# Altium PCB PIC18F57Q84_Curiosity_Nano.PcbDoc (part 3 of 3)
Units mm, origin at the board's own origin, x right, y up, seen from the top; angles counter-clockwise.
Board outline 83.82 x 20.32 mm, 4 copper layers (Top Layer, Gnd Plane, Pwr Plane, Bottom Layer), stack 1.574 mm thick; 85 components, 108 nets, 442 pads, 224 vias.
Unrouted connection lines stored in the file: 1.
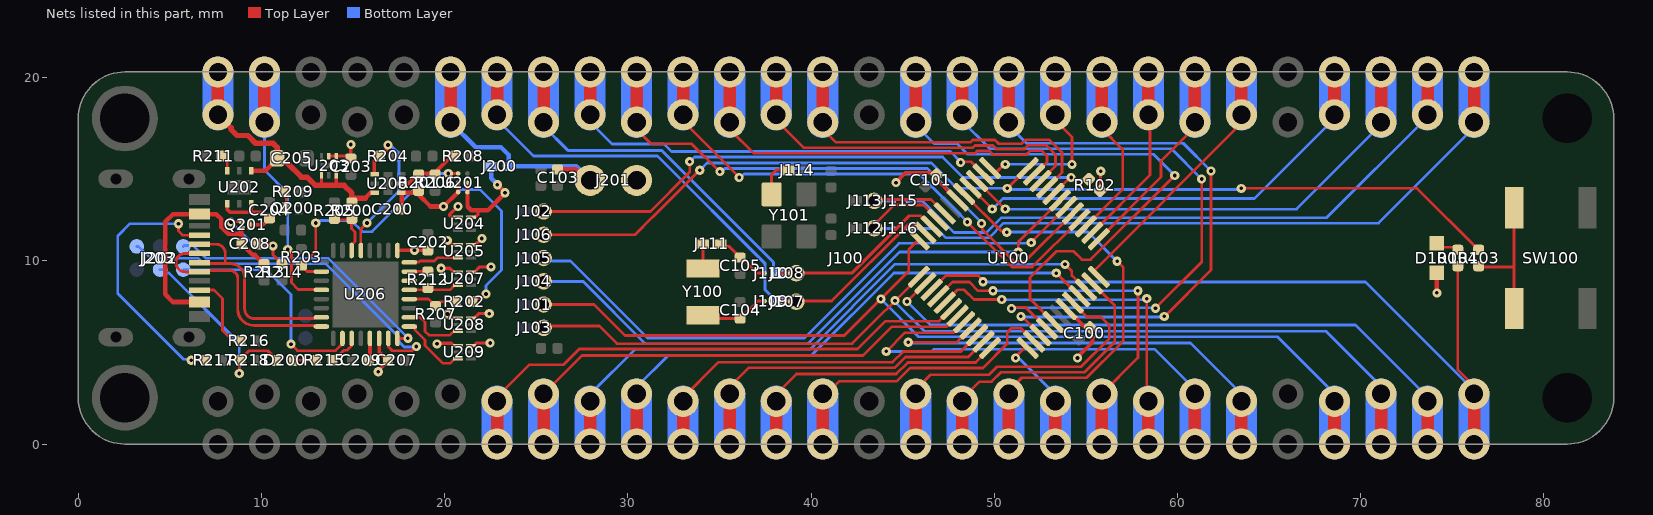
[diagram p4: the nets of this part, all layers, seen from the top]

## Via types
v1: diameter 0.5, hole 0.2, Top Layer to Bottom Layer, 214 vias
v2: diameter 0.5, hole 0.2, Top Layer to Bottom Layer, tented both sides, 8 vias
v3: diameter 0.5, hole 0.2, Top Layer to Bottom Layer, tented top, 2 vias

## Nets (pads, with @x,y where several pads share a name; then routed paths per layer and width w, separated by ;. In a path a pad name is that pad's centre, name@x,y a point inside that pad or via, vN(x,y) a via of type N, cw(c..) or ccw(c..) an arc to the next point about the centre after c; other vN are vias at no path point) (continued)
NetC208_1: C208.1 Q201.1 R214.1 | length 5.5
  Top Layer w0.15: v2(8.338,12.122) 8.366,12.15 Q201.1@8.927,12.15 ; C208.1@9.818,10.931 10.431,10.931 10.536,10.825 v2(10.631,10.825) 10.631,10.339 R214.1@11.145,9.825
  Bottom Layer w0.15: v2(8.338,12.122) 9.635,10.825 v2(10.631,10.825)
NetD100_2: D100.2 R104.2 | length 1.3
  Top Layer w0.15: D100.2@74.168,10.96 74.38,10.748 75.173,10.748 R104.2@75.311,10.61
NetD200_2: D200.2 R215.1 | length 1.3
  Top Layer w0.15: D200.2@11.715,4.575 R215.1@12.98,4.575
NetJ111_2: J111.2 Y100.2 | length 1.3
  Top Layer w0.159: Y100.2@34.103,9.591 J111.2@34.103,10.926
NetJ114_2: J114.2 Y101.1 | length 2.1
  Top Layer w0.159: Y101.1@37.85,13.635 37.85,14.712 38.098,14.96 J114.2@38.775,14.96
NetJ203_A5: J203.A5 R217.1 | length 14.7
  Top Layer w0.15: v2(5.468,12.035) 5.468,11.634 5.691,11.41 J203.A5@6.665,11.41 ; v2(6.165,4.575) R217.1@6.944,4.575
  Bottom Layer w0.15: v2(5.468,12.035) 2.827,12.035 2.15,11.358 2.15,8.219 5.737,4.632 6.108,4.632 v2(6.165,4.575)
NetJ203_B5: J203.B5 R216.1 | length 4.4
  Top Layer w0.15: J203.B5@6.665,8.41 7.411,8.41 7.865,7.956 7.865,6.208 8.44,5.633 R216.1@8.852,5.633
NetQ200_3: Q200.3 R209.1 | length 1
  Top Layer w0.15: R209.1@11.214,13.7 11.355,13.559 Q200.3@11.355,12.8
NetR103_2: R103.2 SW100.3 SW100.4 | length 7.4
  Top Layer w0.15: R103.2@76.454,9.71 76.489,9.675 78.375,9.675 ; SW100.4@78.391,7.41 78.375,7.426 78.375,9.675 ; SW100.3@78.391,12.91 78.375,12.894 78.375,9.675
NetR211_1: R211.1 U202.3 | length 0.9
  Top Layer w0.15: R211.1@7.813,15.725 7.813,15.666 8.135,15.344 U202.3@8.135,14.912
RA0_ANA0: J100.43 U100.21 | length 16.8
  Top Layer w0.15: J100.43@40.64,17.254 J100.43@40.64,17.577 40.64,17.21 41.375,16.475 48.701,16.475 48.826,16.6 50.049,16.6 50.249,16.4 51.5,16.4 51.711,16.611 53.013,16.611 53.672,15.951 53.699,15.951 53.699,14.827 U100.21@52.886,14.014
RA1_ANA1: J100.44 U100.22 | length 18.4
  Top Layer w0.15: J100.44@38.188,18.072 38.188,17.591 39.587,16.193 39.605,16.175 48.826,16.175 48.951,16.3 49.925,16.3 50.125,16.1 51.624,16.1 51.835,16.311 52.854,16.311 53.354,15.811 53.354,15.774 53.354,15.188 U100.22@52.532,14.367
RA2_ANA2: J100.45 U100.23 | length 19.9
  Top Layer w0.15: J100.45@35.56,17.577 35.56,17.192 36.877,15.875 48.95,15.875 49.075,16 49.738,16 49.938,15.8 51.749,15.8 51.959,16.011 52.614,16.011 52.886,15.739 52.886,15.411 U100.23@52.196,14.721
RA3_SW0: J106.2 R103.1 U100.24 | length 56.3
  Top Layer w0.15: J106.2@25.4,11.43 30.38,11.43 31.35,12.4 31.359,12.4 33.909,14.95 v1(33.925,14.95) ; v1(50.714,13.963) U100.24@51.825,15.074 ; v1(63.489,13.963) 73.092,13.963 R103.1@76.445,10.61
  Bottom Layer w0.15: v1(33.925,14.95) 34.325,15.35 46.572,15.35 47.959,13.963 v1(50.714,13.963) 50.781,13.896 63.328,13.896 63.395,13.963 v1(63.489,13.963)
RA4: J100.38 U100.25 | length 7.8
  Top Layer w0.15: U100.25@49.912,14.937 50.004,14.845 50.11,14.845 50.541,15.275 v1(50.6,15.275) ; J100.38@53.252,18.072 53.252,17.758 54.25,16.76 v1(54.25,15.275)
  Bottom Layer w0.15: v1(50.6,15.275) v1(54.25,15.275)
RA5_ANA5: J100.48 U100.26 | length 23.2
  Top Layer w0.15: v1(48.166,15.375) 48.207,15.415 48.727,15.415 U100.26@49.421,14.721
  Bottom Layer w0.15: J100.48@27.852,18.072 28.237,17.686 28.237,17.288 29.144,16.381 31.979,16.381 32.385,15.975 47.607,15.975 48.166,15.415 v1(48.166,15.375)
RA6: J100.29 J116.1 | length 33.9
  Bottom Layer w0.15: 46.85,11.775 47.365,11.26 49.709,11.26 50.514,12.065 70.983,12.065 76.2,17.282 J100.29@76.2,17.577
  Bottom Layer w0.159: J116.1@45.275,11.775 46.85,11.775
RA6_OSC2: J112.2 J116.2 U100.33 | length 5.5
  Top Layer w0.15: J112.2@43.362,11.874 44.538,13.05 46.142,13.05 U100.33@46.946,12.246
  Bottom Layer w0.159: J112.2@43.45,11.785 43.46,11.775 J116.2@44.525,11.775
RA7: J100.30 J115.1 | length 31.9
  Bottom Layer w0.15: 46.091,13.275 47.806,11.56 49.585,11.56 50.39,12.365 68.157,12.365 73.572,17.779 J100.30@73.572,18.072
  Bottom Layer w0.159: J115.1@45.275,13.275 46.091,13.275
RA7_OSC1: J113.2 J115.2 U100.32 | length 5.4
  Top Layer w0.15: J113.2@43.45,13.285 43.515,13.35 46.549,13.35 U100.32@47.388,12.511
  Bottom Layer w0.15: J113.2@43.45,13.285 43.46,13.275 J115.2@44.525,13.275
RB0_UART2/4_TX: J100.16 U100.8 | length 15.2
  Top Layer w0.15: J100.16@45.72,2.743 45.72,2.988 46.519,3.787 49.721,3.787 50.16,4.225 54.75,4.225 56.288,5.763 56.288,6.478 55.82,6.946 55.074,6.946 U100.8@54.3,7.72
RB1_I2C1_SCL: J100.10 U100.9 | length 27.6
  Top Layer w0.15: v1@53.39,9.338 U100.9@54.654,8.074
  Bottom Layer w0.15: J100.10@30.48,2.743 30.48,3.12 32.21,4.85 40.035,4.85 44.522,9.337 v1(53.388,9.337)
RB2_I2C1_SDA: J100.9 U100.10 | length 31.2
  Top Layer w0.15: v1(53.863,9.812) 54.238,9.437 54.238,9.196 U100.10@55.007,8.428
  Bottom Layer w0.15: J100.9@28.028,2.248 28.028,2.808 30.396,5.175 39.936,5.175 44.586,9.825 53.85,9.825 v1(53.863,9.812)
RB3_UART2/4_RX: J100.17 U100.11 | length 13.5
  Top Layer w0.15: J100.17@48.348,2.248 48.348,2.563 49.197,3.412 49.863,3.412 50.377,3.925 54.925,3.925 56.588,5.588 56.588,6.603 56.588,7.554 U100.11@55.361,8.781
  Bottom Layer w0.15: J100.17@48.348,2.248 J100.17@48.348,2.263
RB4_ANB4_PWM2/3: J100.46 U100.16 | length 26.5
  Top Layer w0.15: J100.46@33.02,17.983 33.279,17.724 33.279,17.371 36.075,14.575 v1(36.075,14.554) ; v1(48.537,12.122) 48.537,12.105 50.977,9.665 52.073,9.665 U100.16@54.654,12.246
  Bottom Layer w0.15: v1(36.075,14.554) 36.142,14.554 36.338,14.75 45.909,14.75 v1(48.537,12.122)
RB5_ANB5_PWM2/3: J100.47 U100.17 | length 28.6
  Top Layer w0.15: J100.47@30.48,17.577 30.48,17.195 31.275,16.4 33.482,16.4 35.007,14.875 v1(35.025,14.875) ; v1(49.307,12.041) 49.352,11.997 49.352,11.715 51.084,9.983 51.683,9.983 U100.17@54.3,12.6
  Bottom Layer w0.15: v1(35.025,14.875) 35.113,14.875 35.288,15.05 46.349,15.05 49.307,12.091 v1(49.307,12.041)
RB6_ICSPCLK: J105.2 U100.18 | length 33.4
  Top Layer w0.15: v1(52.028,10.999) 52.028,11.034 U100.18@53.947,12.953
  Bottom Layer w0.15: J105.2@25.4,10.16 25.544,10.016 25.846,10.016 25.863,10 26.87,10 31.095,5.775 39.625,5.775 44.81,10.96 51.989,10.96 v1(52.028,10.999)
RB7_ICSPDAT: J104.2 U100.19 | length 33.2
  Top Layer w0.15: v1(51.313,10.48) 51.313,11.027 U100.19@53.593,13.307
  Bottom Layer w0.15: J104.2@25.4,8.89 25.409,8.881 27.565,8.881 30.971,5.475 39.812,5.475 44.825,10.488 51.305,10.488 v1(51.313,10.48)
RC0: J100.49 J108.1 | length 16.6
  Bottom Layer w0.159: J100.49@25.4,17.577 25.4,17.362 26.722,16.04 31.84,16.04 37.954,9.925 37.954,9.502 38.125,9.332 J108.1@38.2,9.332
RC0_ANC0: J108.2 J110.1 U100.34 | length 9.9
  Top Layer w0.159: J110.1@38.213,9.332 39.231,9.332 42.223,9.332 45.36,12.469 45.974,12.469 46.539,11.904 U100.34@46.593,11.904
RC1: J100.50 J107.1 | length 20.6
  Bottom Layer w0.159: J100.50@22.86,17.983 22.86,17.722 24.851,15.731 31.619,15.731 37.498,9.852 37.498,8.417 37.954,7.961 37.954,7.946 38.125,7.775 J107.1@38.2,7.775
RC1_ANC1: J107.2 J109.1 U100.35 | length 10
  Top Layer w0.15: J107.2@39.231,7.808 41.129,7.808 45.337,12.016 45.656,12.016 46.133,11.539 U100.35@46.239,11.539
  Top Layer w0.159: J109.1@38.213,7.807 39.23,7.807 J107.2@39.231,7.808
RC2: J100.20 U100.40 | length 18
  Top Layer w0.15: U100.40@46.946,8.074 47.718,8.846 48.649,8.846 49.124,8.371 v1(49.937,8.371) ; J100.20@55.792,2.655 57.857,4.72 57.857,8.365 v1(57.847,8.375)
  Bottom Layer w0.15: v1(49.937,8.371) 57.843,8.371 v1(57.847,8.375)
RC3: J100.21 U100.41 | length 17.3
  Top Layer w0.15: U100.41@47.3,7.72 48.007,8.428 48.36,8.428 48.892,7.896 v1(50.412,7.896) ; J100.21@58.332,2.248 58.332,7.942 v1(58.333,7.944)
  Bottom Layer w0.15: v1(50.412,7.896) 50.433,7.875 58.169,7.875 58.239,7.944 v1(58.333,7.944)
RC4_SPI1_MOSI: J100.11 U100.46 | length 17.8
  Top Layer w0.15: J100.11@32.932,2.248 32.932,2.452 34.957,4.477 44.454,4.477 45.039,5.062 48.176,5.062 U100.46@49.068,5.953
RC5_SPI1_MISO: J100.12 U100.47 | length 15.3
  Top Layer w0.15: J100.12@35.56,2.743 35.56,3.128 36.607,4.175 44.576,4.175 45.163,4.762 48.584,4.762 U100.47@49.421,5.599
RC6_SPI1_SCK: J100.13 U100.48 | length 13.2
  Top Layer w0.15: J100.13@38.012,2.248 38.012,2.637 39.2,3.825 44.651,3.825 45.287,4.462 48.991,4.462 U100.48@49.775,5.246
RC7: J100.19 U100.1 | length 4.2
  Top Layer w0.15: v1(51.171,4.7) 51.171,4.768 U100.1@51.649,5.246
  Bottom Layer w0.15: v1(51.171,4.7) 51.238,4.633 51.411,4.633 53.252,2.792 J100.19@53.252,2.248
RD0_UART2/4_TX: J100.7 U100.42 | length 27
  Top Layer w0.15: J100.7@22.86,2.337 22.86,2.574 24.626,4.34 26.502,4.34 27.349,5.187 29.285,5.187 29.533,5.187 42.532,5.187 44.057,6.712 46.998,6.712 U100.42@47.653,7.367
RD1_UART2/4_RX: J100.8 U100.43 | length 24.4
  Top Layer w0.15: J100.8@25.4,2.743 27.493,4.837 42.837,4.837 44.412,6.412 47.405,6.412 U100.43@48.007,7.013
RD2: J100.22 U100.44 | length 23
  Top Layer w0.15: v1(44.112,5.062) 45.137,6.087 47.787,6.087 U100.44@48.36,6.66
  Bottom Layer w0.15: v1(44.112,5.062) 46.587,5.062 46.7,5.175 58.768,5.175 60.96,2.983 J100.22@60.96,2.743
RD3: J100.23 U100.45 | length 23.5
  Top Layer w0.15: v1(45.31,5.564) 47.972,5.564 U100.45@48.714,6.306
  Bottom Layer w0.15: v1(45.31,5.564) 45.355,5.519 60.713,5.519 63.412,2.821 J100.23@63.412,2.248
RD4_SPI1_SS: J100.14 U100.2 | length 13.9
  Top Layer w0.15: J100.14@40.552,2.655 40.779,2.655 41.561,3.437 44.687,3.437 45.412,4.162 49.387,4.162 50.712,5.487 50.712,6.087 50.949,6.324 51.454,6.324 U100.2@52.286,5.492
RD5: J100.39 U100.3 | length 30.7
  Top Layer w0.15: v1(51.456,6.976) 51.509,6.976 U100.3@52.623,5.862 ; v1(59.282,6.975) 59.31,6.975 61.837,9.501 v1(61.837,14.912)
  Bottom Layer w0.15: J100.39@50.712,17.488 51.775,16.425 60.323,16.425 v1(61.837,14.912) ; v1(51.456,6.976) 51.486,6.946 59.253,6.946 v1(59.282,6.975)
RD6: J100.40 U100.4 | length 33.1
  Top Layer w0.15: v1(50.949,7.4) 51.016,7.467 51.206,7.467 51.212,7.473 51.719,7.473 U100.4@52.886,6.306 ; v1(58.807,7.421) 61.334,9.949 61.334,14.466 v1(61.325,14.475)
  Bottom Layer w0.15: J100.40@48.172,17.895 48.172,17.728 49.775,16.125 59.675,16.125 v1(61.325,14.475) ; v1(50.949,7.4) 51,7.451 58.777,7.451 v1(58.807,7.421)
RD7: J100.41 U100.5 | length 29.4
  Top Layer w0.15: U100.5@53.561,6.338 51.962,7.938 51.962,9.087 53.406,10.531 54.324,10.531 54.787,10.068 55.262,10.068 v1(59.858,14.665)
  Bottom Layer w0.15: J100.41@45.632,17.488 46.708,16.413 47.962,16.413 48.55,15.825 58.698,15.825 v1(59.858,14.665)
RE0: J100.31 U100.27 | length 24.7
  Top Layer w0.15: U100.27@49.068,14.367 50.595,12.84 v1(50.606,12.84)
  Bottom Layer w0.15: v1(50.606,12.84) 50.616,12.829 66.509,12.829 71.12,17.44 J100.31@71.12,17.577
RE1: J100.32 U100.28 | length 22.7
  Top Layer w0.15: U100.28@48.714,14.014 v1(49.898,12.829)
  Bottom Layer w0.15: v1(49.898,12.829) 50.482,13.413 64.207,13.413 68.492,17.697 J100.32@68.492,18.072
RE2: J100.18 U100.29 | length 21.9
  Top Layer w0.15: U100.29@48.36,13.66 50.385,11.636 50.623,11.636 v1(50.69,11.569) ; J100.18@50.712,2.832 51.505,3.625 55.049,3.625 56.888,5.464 56.888,5.499 57.05,5.66 57.05,9.645 v1(56.712,9.983)
  Bottom Layer w0.15: v1(50.69,11.569) 50.705,11.584 55.111,11.584 v1(56.712,9.983)
RE3_M\C\L\R\: J102.2 R102.1 U100.20 | length 33.1
  Top Layer w0.15: J102.2@25.4,12.7 31.235,12.7 33.375,14.84 v1(33.375,15.425) ; U100.20@53.24,13.66 v1@54.138,14.559 ; v1(54.198,14.559) 54.293,14.559 54.388,14.464 R102.1@55.161,14.464
  Bottom Layer w0.15: v1(33.375,15.425) 33.388,15.425 33.638,15.675 47.188,15.675 48.304,14.559 v1(54.198,14.559)
REG_ADJUST: R201.2 R206.2 R208.1 U200.5 | length 3.4
  Top Layer w0.2: U200.5@17.655,14.225 18.03,14.225 18.58,14.775 19.505,14.775 19.505,14.85 R208.1@20.38,15.725
REG_ENABLE: R204.1 U200.1 U206.13 | length 8.9
  Top Layer w0.15: U206.13@15.416,10.556 15.416,11.736 v1(15.755,12.075)
  Top Layer w0.2: U200.1@16.155,14.725 16.155,15.475 16.405,15.725 R204.1@16.373,15.725 ; R204.1@16.455,15.725 16.455,15.73 16.65,15.925 16.655,15.925 16.848,16.118 16.848,16.275 v1(16.905,16.333)
  Bottom Layer w0.15: v1(15.755,12.075) 17.506,13.826 17.506,15.853 17.151,16.207 17.125,16.207 17,16.333 v1(16.905,16.333)
RESERVED: U206.6
RF0_UART1/3/5_TX: J100.25 J101.2 U100.36 | length 51.3
  Top Layer w0.15: J101.2@25.41,7.61 J101.2@25.4,7.62 28.152,7.62 29.846,5.926 41.814,5.926 45.337,9.449 45.337,10.636 U100.36@45.886,11.185
  Bottom Layer w0.15: v1(43.812,7.924) 45.873,5.862 65.461,5.862 68.492,2.832 J100.25@68.492,2.425
RF1_UART1/3/5_RX: J100.26 J103.2 U100.37 | length 51.4
  Top Layer w0.15: J103.2@25.4,6.35 25.5,6.45 28.446,6.45 29.409,5.487 42.238,5.487 U100.37@45.886,9.135
  Bottom Layer w0.15: v1(44.586,7.836) 44.586,7.762 46.186,6.162 68.119,6.162 71.12,3.162 J100.26@71.12,2.743
RF2: J100.27 U100.38 | length 32.3
  Top Layer w0.15: v1(45.245,7.787) U100.38@46.239,8.781
  Bottom Layer w0.15: v1(45.245,7.787) 46.531,6.5 69.726,6.5 73.572,2.655 J100.27@73.572,2.248
RF3_LED0: J100.28 R104.1 U100.39 | length 40.1
  Top Layer w0.138: R104.1@75.311,9.71 75.311,4.055 76.2,3.166 J100.28@76.2,2.743
  Top Layer w0.15: U100.39@46.593,8.428 47.377,9.212 49.124,9.212 49.387,8.949 v1(49.387,8.862)
  Bottom Layer w0.15: v1(49.387,8.862) 49.398,8.85 70.275,8.85 76.2,2.925 J100.28@76.2,2.743
RF4: J100.34 U100.12 | length 12.2
  Top Layer w0.15: U100.12@55.714,9.135 55.466,9.383 55.466,9.489 63.203,17.227 63.203,17.51 J100.34@63.588,17.895
RF5: J100.35 U100.13 | length 8.6
  Top Layer w0.15: U100.13@55.714,11.185 59.109,14.58 59.109,15.468 60.96,17.319 J100.35@60.96,17.577
RF6: J100.36 U100.14 | length 7.8
  Top Layer w0.15: U100.14@55.361,11.539 58.508,14.686 58.508,17.736 J100.36@58.508,18.072
RF7: J100.37 U100.15 | length 7
  Top Layer w0.15: U100.15@55.007,11.892 57.013,13.899 57.013,16.082 55.88,17.215 J100.37@55.88,17.577
S0_0_RX: R212.1 U206.5 U207.3 | length 2.8
  Top Layer w0.15: U206.5@18.06,8.424 20.28,8.424 20.531,8.675 U207.3@20.729,8.675
S0_2_TX: R212.2 U206.7 | length 1
  Top Layer w0.15: U206.7@18.06,9.424 R212.2@19.055,9.424
S0_3_CLK: U205.3 U206.8 | length 2.8
  Top Layer w0.15: U206.8@18.06,9.937 18.595,9.937 18.659,10 19.43,10 19.605,10.175 U205.3@20.729,10.175
S1_0_TX: U206.1 U209.3 | length 3.9
  Top Layer w0.15: U206.1@18.07,6.42 18.33,6.42 18.376,6.374 18.376,6.231 18.93,5.677 18.93,5.389 19.906,4.413 20.291,4.413 20.554,4.675 U209.3@20.729,4.675
S1_1_RX: U206.2 U208.3 | length 3.5
  Top Layer w0.15: U206.2@18.06,6.924 18.666,6.924 18.93,6.66 18.93,6.156 19.136,5.95 20.28,5.95 20.505,6.175 U208.3@20.729,6.175
S\R\S\T\: J202.6 U206.26 | length 12.5
  Top Layer w0.15: v3(11.609,5.458) 11.967,5.1 13.102,5.1 14.05,5.1 14.465,5.515 14.465,5.55 14.47,5.555 U206.26@14.47,5.695
  Bottom Layer w0.15: J202.6@5.73,9.525 10.245,9.524 11.609,8.16 v3(11.609,5.458)
SOSCI: C104.2 J109.2 Y100.1 | length 3.9
  Top Layer w0.159: Y100.1@34.103,7.041 34.294,6.85 C104.2@36.135,6.85 37.105,7.82 37.45,7.82 J109.2@37.463,7.807 J109.2@37.446,7.789
SOSCO: C105.1 J110.2 J111.1 | length 3.1
  Top Layer w0.159: J111.1@35.053,10.926 35.179,10.8 35.521,10.8 C105.1@36.135,10.186 36.191,10.186 36.387,9.99 36.396,9.99 37.054,9.332 J110.2@37.463,9.332
STATUS_LED: R215.2 U206.27 | length 1.7
  Top Layer w0.15: R215.2@13.93,4.575 13.955,4.575 14.455,5.075 14.5,5.12 14.66,5.12 14.765,5.225 14.933,5.393 U206.27@14.933,5.777
SWCLK: J202.1 U206.31 | length 19.9
  Top Layer w0.15: U206.31@16.924,5.787 16.924,5.316 17.14,5.1 18.224,5.1 v1(18.455,5.331)
  Bottom Layer w0.15: J202.1@3.19,10.795 3.285,10.795 3.93,10.15 6.536,10.15 6.833,9.853 13.496,9.853 17.514,5.835 17.514,5.587 17.792,5.309 18.433,5.309 v1(18.455,5.331)
SWDIO: J202.5 U206.32 | length 14.9
  Top Layer w0.15: U206.32@17.42,5.77 17.975,5.77 v1(17.989,5.784)
  Bottom Layer w0.15: J202.5@5.73,10.795 5.778,10.843 6.267,10.843 6.958,10.153 13.62,10.153 v1(17.989,5.784)
USBD_N: J203.A7 J203.B7 U206.23 | length 13
  Top Layer w0.16: J203.B7@6.665,10.91 6.669,10.914 7.523,10.914 ; U206.23@13.27,6.92 12.946,6.92 12.886,6.86 9.59,6.86 ; J203.A7@6.725,9.85 cw(c6.725,9.91) 6.665,9.91 ccw(c6.725,9.91) J203.A7@6.725,9.85 ; J203.A7@6.725,9.85 8.025,9.85 ; 7.522,10.914 cw(c7.522,10.414) 8.022,10.414 ; 7.522,10.914 cw(c7.522,10.414) 8.022,10.414 ; 8.022,10.414 8.022,9.852 8.025,9.85 ; 8.025,9.85 8.296,9.85 cw(c8.296,9.063) 9.083,9.063 9.083,7.366 ; 9.083,7.366 ccw(c9.59,7.366) 9.59,6.86 ; 9.083,7.366 ccw(c9.59,7.366) 9.59,6.86
USBD_P: J203.A6 J203.B6 U206.24 | length 15.3
  Top Layer w0.16: 5.327,9.912 cw(c5.827,9.912) 5.827,10.412 J203.A6@6.665,10.412 ; U206.24@13.27,6.42 12.946,6.42 12.886,6.48 9.59,6.48 ; 5.827,9.408 cw(c5.827,9.908) 5.327,9.908 ccw(c5.827,9.908) 5.827,9.408 ; 5.827,9.408 6.665,9.408 J203.B6@6.665,9.41 ; J203.B6@6.665,9.41 cw(c6.725,9.41) J203.B6@6.725,9.47 ; J203.B6@6.665,9.41 cw(c6.725,9.41) J203.B6@6.725,9.47 ; J203.B6@6.725,9.47 8.296,9.47 ; 8.296,9.47 cw(c8.296,9.063) 8.703,9.063 ; 8.296,9.47 cw(c8.296,9.063) 8.703,9.063 ; 8.703,7.366 ccw(c9.59,7.366) 9.59,6.48 ; 8.703,7.366 ccw(c9.59,7.366) 9.59,6.48 ; 8.703,7.366 8.703,9.063
V\O\F\F\: J100.55 U206.20 | length 11.2
  Top Layer w0.15: v1(11.433,10.628) 11.433,10.573 11.635,10.371 11.635,8.815 12.003,8.447 12.873,8.447 12.88,8.439 13.251,8.439 U206.20@13.27,8.42
  Bottom Layer w0.15: J100.55@10.16,17.577 10.16,14.958 11.433,13.686 v1(11.433,10.628)
VBUS: C208.2 J203.A4/B9 J203.B4/A9 Q201.2 R213.1 | length 13.6
  Top Layer w0.2: 8.927,11.475 Q201.2@8.927,11.715
  Top Layer w0.25: J203.B4/A9@6.675,7.76 6.665,7.76 5.16,7.76 4.74,8.18 4.74,12.131 5.169,12.56 6.665,12.56 7.528,12.56 7.813,12.275 7.813,11.832 8.171,11.475 8.927,11.475 C208.2@8.927,10.94 ; C208.2@8.918,10.931 8.918,10.912 9.067,10.763 9.085,10.763 9.523,10.325 9.644,10.325 9.976,9.992 9.976,9.974 10.121,9.829 R213.1@10.139,9.829
VBUS_ADC: R200.2 R205.2 U206.14 | length 2.8
  Top Layer w0.15: R205.2@13.979,12.25 14.916,12.25 14.916,11.764 15.105,11.575 15.105,11.068 14.916,10.879 U206.14@14.916,10.556
VBUS_DELAYED: C204.2 Q201.3 U202.4 U202.6 | length 4.5
  Top Layer w0.2: U202.4@8.135,13.128 8.135,13.054 8.135,12.803 8.286,12.652 10.108,12.652 10.266,12.494 10.266,12.476 C204.2@10.415,12.327 ; Q201.3@9.41,11.975 10.082,11.975 10.266,12.16 10.266,12.178 C204.2@10.415,12.327 ; U202.6@9.435,13.128 9.435,12.669 9.437,12.667 ; C204.2@10.434,12.327 C204.2@10.415,12.327
VCC_EDGE: C103.2 J100.51 J200.2 J201.1 | length 11.5
  Top Layer w0.25: C103.2@26.162,15.004 27.163,15.004 27.766,14.402 J201.1@27.94,14.402 ; J201.1@27.786,14.402 J201.1@27.94,14.402
  Bottom Layer w0.25: J100.51@20.32,17.577 21.694,16.203 23.074,16.203 23.49,15.787 J200.2@23.49,15.162 27.18,15.162 J201.1@27.94,14.402
VCC_LEVEL: J200.1 U201.A1 U201.B1 U204.6 U205.6 U207.6 U208.6 U209.6 | length 10.5
  Top Layer w0.175: U209.6@21.429,5.375 21.605,5.375 21.755,5.525 v1(22.48,5.525) ; U208.6@21.429,6.875 21.605,6.875 21.855,7.125 v1(22.43,7.125) ; U207.6@21.429,9.375 21.442,9.388 21.627,9.388 21.915,9.675 v1(22.53,9.675) ; U205.6@21.429,10.875 21.68,10.875 v1(22.03,11.225) ; U204.6@21.429,12.375 21.442,12.388 21.677,12.388 21.815,12.525 21.815,12.767
  Top Layer w0.2: U201.A1@21.242,13.775 U201.B1@21.242,14.267
  Top Layer w0.225: 21.242,12.963 U201.A1@21.242,13.759 U201.A1@21.242,13.775
  Top Layer w0.25: 21.254,12.963 21.449,12.767 21.815,12.767 22.362,12.767 23.29,13.695 v1(23.29,13.725) 23.29,13.745 v1(22.876,14.159)
  Bottom Layer w0.25: J200.1@22.54,15.162 22.54,14.525 22.876,14.189 v1(22.876,14.159)
VCC_MCU_CORE: C209.2 U206.29 | length 1.2
  Top Layer w0.2: C209.2@15.88,4.575 15.924,4.619 U206.29@15.924,5.787
VCC_P3V3: C202.2 C203.2 C207.1 D200.1 J202.4 R218.2 U203.1 U203.2 U204.1 U205.1 U206.9 U206.30 U207.1 U208.1 U209.1 | length 21.8
  Top Layer w0.15: v1(8.785,3.855) 8.785,4.511 R218.2@8.848,4.575 8.848,4.625 9.323,5.1 10.34,5.1 10.815,4.625 D200.1@10.815,4.575
  Top Layer w0.175: U203.2@13.679,15.725 14.779,15.725 C203.2@14.879,15.625 ; v1(19.581,5.475) 19.613,5.507 20.363,5.507 20.483,5.388 20.717,5.388 20.729,5.375 U209.1@20.508,5.375 ; v1(19.804,9.6) 20.28,9.6 20.505,9.375 U207.1@20.729,9.375 ; v1(20.139,11.125) 20.389,10.875 U205.1@20.729,10.875 ; v1(20.155,7.1) 20.38,6.875 U208.1@20.729,6.875 ; U204.1@20.729,12.375 20.383,12.375 20.28,12.478 20.28,12.541 20.712,12.973 v1(20.729,12.973)
  Top Layer w0.2: C203.2@14.879,15.6 v1(14.879,16.357) ; v1(16.375,3.95) 16.375,4.009 16.905,4.539 C207.1@16.905,4.575 ; U206.30@16.424,5.787 16.424,5.031 C207.1@16.88,4.575 ; U206.9@17.416,10.581 v1(18.355,10.581) 18.969,10.581 C202.2@19.055,10.495
  Bottom Layer w0.15: J202.4@4.46,9.525 4.636,9.525 4.813,9.348 4.946,9.348 8.786,5.508 v1(8.785,3.855)
VCC_REGULATOR: C200.2 R201.1 R202.2 U200.4 U201.A2 U201.B2 | length 23.7
  Top Layer w0.175: R202.2@21.579,7.875 21.653,7.95 22.005,7.95 v1(22.255,8.2) ; v1@22.305,8.175 v1@22.33,8.2
  Top Layer w0.2: R201.1@18.58,13.62 R201.1@18.58,13.775 ; U201.A2@20.742,13.775 U201.B2@20.742,14.275
  Top Layer w0.225: v1(19.94,12.973) U201.A2@20.742,13.775
  Top Layer w0.24: C200.2@17.655,13.02 17.655,13.725 18.53,13.725 R201.1@18.58,13.775
  Top Layer w0.25: R201.1@18.58,13.62 19.227,12.973 v1(19.94,12.973)
  Bottom Layer w0.15: 20.867,13.9 21.927,13.9 ; 20.867,13.9 21.927,13.9 ; 20.867,13.9 v1(19.94,12.973) 20.867,13.9 ; 21.927,13.9 23.105,12.722 ; 21.927,13.9 23.105,12.722 ; 22.255,8.654 v1(22.255,8.2) 22.255,8.654 ; 22.255,8.654 23.105,9.504 ; 22.255,8.654 23.105,9.504 ; 23.105,9.504 23.105,12.722 ; 23.105,9.504 23.105,12.722
VCC_TARGET: C100.1 C101.2 D100.1 J201.2 R102.2 U100.7 U100.30 | length 10.4
  Top Layer w0.175: R102.2@55.797,13.828 55.797,14.876 v1(55.815,14.894)
  Top Layer w0.2: v1(44.637,14.275) 44.637,14.288 45.172,14.824 46.797,14.824 46.758,14.785 46.758,14.555 U100.30@48.007,13.307 ; U100.7@53.947,7.367 53.985,7.367 54.951,6.4 55.247,6.4 55.363,6.283 55.363,5.567 54.55,4.753 v1(54.55,4.7)
  Top Layer w0.25: v1(74.168,8.255) D100.1@74.168,9.36
VCC_VBUS: C205.2 J100.56 R200.1 U200.3 U202.1 U203.4 U203.6 | length 14
  Top Layer w0.175: 13.279,14.151 U203.4@13.279,14.675 ; 14.079,14.151 U203.6@14.079,14.675
  Top Layer w0.24: 15.655,13.425 15.955,13.725 U200.3@16.155,13.725
  Top Layer w0.25: U202.1@9.455,14.928 10.218,14.928 C205.2@10.858,15.569
  Top Layer w0.3: J100.56@7.62,17.983 8.34,17.263 8.34,17.171 8.662,16.849 9.26,16.849 9.683,16.426 10.629,16.426 10.858,16.197 C205.2@10.858,15.597 10.909,15.546 11.067,15.388 11.358,15.388 12.175,14.571 12.493,14.571 12.939,14.125 14.504,14.125 14.929,13.7 R200.1@14.929,13.425 ; R200.1@14.929,13.25 R200.1@14.929,13.425 ; 15.655,13.425 R200.1@14.929,13.425
VTG_ADC: R202.1 R207.2 U206.4 | length 2.7
  Top Layer w0.15: U206.4@18.06,7.924 19.11,7.924 R207.2@19.505,7.529 ; R207.2@19.543,7.561 19.756,7.775 R202.1@20.579,7.775
VTG_EN: R203.1 U201.C2 U206.18 | length 13.3
  Top Layer w0.15: v1(12.965,12.075) 12.965,10.534 R203.1@12.175,9.744 12.499,9.42 U206.18@13.27,9.42 ; v1(20.199,14.775) U201.C2@20.742,14.775
  Bottom Layer w0.15: v1(12.965,12.075) 13.06,12.075 13.195,12.211 14.894,12.211 15.505,11.6 16.03,11.6 19.205,14.775 v1(20.199,14.775)
pads on no net: J100.1 J109.5 J110.5 J115.5 J116.5 J202.3 J203.0 J203.A8 J203.B8 Q200.0 Q201.0 U202.0 U203.5

## Polygon pours and split planes (outlines as drawn)
GND on Bottom Layer "Bottom Layer-GND" (solid, remove dead copper, pour order 1): 83.82,20.32 83.82,0 0,0 0,20.32
GND on Top Layer "Top Layer-GND" (solid, remove dead copper, pour order 0): 83.82,20.32 83.82,0 0,0 0,20.32
VCC_P3V3 on Pwr Plane (split plane): 2.54,19.81 21.461,19.81 21.461,14.6 21.461,4.95 21.461,0.51 2.54,0.51 2.524,0.509 2.341,0.518 2.144,0.547 1.95,0.596 1.762,0.663 1.582,0.748 1.411,0.851 1.251,0.969 1.103,1.103 0.969,1.251 0.851,1.411 0.748,1.582 0.663,1.762 0.596,1.95 0.547,2.144 0.518,2.341 0.509,2.524 0.51,2.54 0.51,17.78 0.509,17.796 0.518,17.979 0.547,18.176 0.596,18.37 0.663,18.558 0.748,18.738 0.851,18.909 0.969,19.069 1.103,19.217 1.251,19.351 1.411,19.469 1.582,19.572 1.762,19.657 1.95,19.724 2.144,19.773 2.341,19.802 2.524,19.811
VCC_TARGET on Pwr Plane (split plane): 81.479,19.802 81.676,19.773 81.87,19.724 82.058,19.657 82.238,19.572 82.409,19.469 82.569,19.351 82.717,19.217 82.851,19.069 82.969,18.909 83.072,18.738 83.157,18.558 83.224,18.37 83.273,18.176 83.302,17.979 83.311,17.796 83.31,17.78 83.31,2.54 83.311,2.524 83.302,2.341 83.273,2.144 83.224,1.95 83.157,1.762 83.072,1.582 82.969,1.411 82.851,1.251 82.717,1.103 82.569,0.969 82.409,0.851 82.238,0.748 82.058,0.663 81.87,0.596 81.676,0.547 81.479,0.518 81.296,0.509 81.28,0.51 21.719,0.51 21.719,4.821 24.255,4.821 24.305,4.83 24.347,4.858 24.375,4.9 24.384,4.95 24.384,14.6 24.375,14.65 24.347,14.692 24.305,14.72 24.255,14.729 21.719,14.729 21.719,19.81 81.28,19.81 81.296,19.811
VCC_LEVEL on Pwr Plane (split plane): 24.126,5.079 21.719,5.079 21.719,14.47 24.126,14.47
GND on Gnd Plane (split plane): 81.479,19.802 81.676,19.773 81.87,19.724 82.058,19.657 82.238,19.572 82.409,19.469 82.569,19.351 82.717,19.217 82.851,19.069 82.969,18.909 83.072,18.738 83.157,18.558 83.224,18.37 83.273,18.176 83.302,17.979 83.311,17.796 83.31,17.78 83.31,2.54 83.311,2.524 83.302,2.341 83.273,2.144 83.224,1.95 83.157,1.762 83.072,1.582 82.969,1.411 82.851,1.251 82.717,1.103 82.569,0.969 82.409,0.851 82.238,0.748 82.058,0.663 81.87,0.596 81.676,0.547 81.479,0.518 81.296,0.509 81.28,0.51 2.54,0.51 2.524,0.509 2.341,0.518 2.144,0.547 1.95,0.596 1.762,0.663 1.582,0.748 1.411,0.851 1.251,0.969 1.103,1.103 0.969,1.251 0.851,1.411 0.748,1.582 0.663,1.762 0.596,1.95 0.547,2.144 0.518,2.341 0.509,2.524 0.51,2.54 0.51,17.78 0.509,17.796 0.518,17.979 0.547,18.176 0.596,18.37 0.663,18.558 0.748,18.738 0.851,18.909 0.969,19.069 1.103,19.217 1.251,19.351 1.411,19.469 1.582,19.572 1.762,19.657 1.95,19.724 2.144,19.773 2.341,19.802 2.524,19.811 2.54,19.81 81.28,19.81 81.296,19.811

## Keep-outs
Top Layer:
  region: 40.342,14.414 40.342,15.506 38.158,15.506 38.158,14.414
  region: 41.502,10.659 41.502,14.317 37.254,14.317 37.254,10.659
  rectangle: 45.751,14.432 45.9,14.551
  rectangle: 54.265,6.308 54.509,6.638
  rectangle: 52.686,7.607 52.93,7.937
  region: 35.67,10.38 35.67,11.472 33.486,11.472 33.486,10.38
  region: 35.053,6.516 35.053,10.121 33.153,10.121 33.153,6.516
Bottom Layer:
  rectangle: 27.94,13.552 30.48,15.252
  region: 23.655,14.69 23.655,15.666 22.282,15.666 22.282,14.69
Keep-Out Layer:
  text "'.Layer_Name'" at 174.01,-104.74 h1.5

## Other copper
Top Layer:
  pour cut-out: 41.475,13.86 41.475,11.033 43.954,11.033 43.954,13.86
  region net GND: 19.741,6.67 19.768,6.697 19.798,6.702 19.809,6.678 19.821,6.662 19.835,6.642 19.845,6.632 19.863,6.618 19.886,6.613 19.901,6.616 19.912,6.604 19.916,6.584 19.881,6.538 19.756,6.522 19.711,6.568
  region net VTG_ADC: 19.795,7.658 19.774,7.712 19.88,7.706 19.853,7.699 19.831,7.69 19.813,7.675
  region net GND: 18.724,11.343 18.794,11.413 18.825,11.343
  pour cut-out: 35.154,10.036 35.154,7.103 38.496,7.103 38.496,10.036
  text ".ProjectPCBFabRevision" at 209.188,-104.562 h1.5
  text "'.Layer_Name'" at 174.01,-104.74 h1.5
Bottom Layer:
  pour cut-out: 25.99,13.356 25.99,5.694 23.875,5.694 23.875,13.356
  region net DBG0: 24.332,8.448 24.403,8.578 24.543,8.578 24.643,8.448
  pour cut-out: 37.635,9.975 37.635,7.14 39.815,7.14 39.815,9.975
  text ".ProjectPCBFabRevision" at 209.188,-104.562 h1.5
  text ".ProjectPCBFabRevision" at 209.188,-104.562 h1.5
  text ".ProjectPCBFabRevision" at 209.188,-104.562 h1.5
  text "'.Layer_Name'" at 174.01,-104.74 h1.5
Pwr Plane (plane layer: these items are gaps in the copper):
  lines w0.254: 21.59,0.016 21.59,4.95 ; 21.59,20.32 21.59,14.6 ; 21.59,4.95 21.59,14.6 ; 21.59,4.95 24.255,4.95 24.255,14.6 21.59,14.6

## Silkscreen, mask and mechanical layers (free items; w line width, h text height)
Top Overlay:
  lines w0.15: 6.699,3.989 21.364,3.989 ; 6.699,16.306 21.391,16.306 ; 17.525,16.75 18.025,16.75 ; 18.975,16.75 19.475,16.75 ; 19.225,16.5 19.225,17
  text "GND" at 5.497,16.58 h0.9 r90
  text "RC1" at 22.036,16.084 h0.75
  text "RA5" at 26.94,16.074 h0.75
  text "RB4" at 32.02,16.074 h0.75
  text "RA1" at 37.225,16.074 h0.75
  text "GND" at 42.18,16.074 h0.75
  text "RD6" at 47.26,16.074 h0.75
  text "RA4" at 52.34,16.074 h0.75
  text "RF6" at 57.42,16.074 h0.75
  text "RF4" at 62.5,16.074 h0.75
  text "RE1" at 67.705,16.074 h0.75
  text "RC0" at 24.4,15.677 h0.75
  text "RB5" at 29.48,15.677 h0.75
  text "RA2" at 34.56,15.677 h0.75
  text "RA0" at 39.64,15.677 h0.75
  text "RD7" at 44.72,15.677 h0.75
  text "RD5" at 49.8,15.677 h0.75
  text "RF7" at 54.88,15.677 h0.75
  text "RF5" at 59.96,15.677 h0.75
  text "GND" at 65.04,15.677 h0.75
  text "RE0" at 70.12,15.677 h0.75
  text "SW0" at 79.391,14.846 h0.75
  text "(RA7)" at 72.821,14.129 h0.75 r45
  text "(RA6)" at 75.361,13.958 h0.75 r45
  text "POWER" at 27.461,12.5 h0.75
  text "LED0" at 72.735,12.035 h0.75
  text "10MHz" at 36.804,10.799 h0.75 r90
  text "PIC® / MCU" at 65.5,8.189 h2.2
  text "RF3" at 73.109,6.794 h0.75
  text "DEBUGGER" at 8.35,6.697 h0.75 r90
  text "32KHz" at 32.8,6.58 h0.75 r90
  text "'.ProjectTargetName'" at 36.8,5.393 h0.9
  text "PS" at 10.66,5.175 h0.75
  text "'.ProjectTargetName' / CURIOSITY NANO" at 24.816,4.791 h1.35 r90
  text "RA3" at 79.391,4.8 h0.75
  text "1" at 58.199,4.201 h8.5
  text "RD1" at 24.525,3.913 h0.75
  text "RB1" at 29.605,3.913 h0.75
  text "RC5" at 34.56,3.913 h0.75
  text "RD4" at 39.64,3.913 h0.75
  text "RB0" at 44.72,3.913 h0.75
  text "RE2" at 49.8,3.913 h0.75
  text "RC2" at 54.88,3.913 h0.75
  text "RD2" at 59.96,3.913 h0.75
  text "GND" at 65.04,3.913 h0.75
  text "RF1" at 70.245,3.913 h0.75
  text "RF3" at 75.2,3.913 h0.75
  text "RD0" at 21.86,3.534 h0.75
  text "RB2" at 26.94,3.534 h0.75
  text "RC4" at 32.02,3.534 h0.75
  text "RC6" at 37.1,3.534 h0.75
  text "GND" at 42.18,3.534 h0.75
  text "RB3" at 47.26,3.534 h0.75
  text "RC7" at 52.34,3.534 h0.75
  text "RC3" at 57.42,3.534 h0.75
  text "RD3" at 62.5,3.534 h0.75
  text "RF0" at 67.58,3.534 h0.75
  text "RF2" at 72.66,3.534 h0.75
  text "GND" at 5.497,1.34 h0.9 r90
  text ".ProjectPCBFabRevision" at 209.188,-104.562 h1.5
  text "'.Layer_Name'" at 174.01,-104.74 h1.5
Bottom Overlay:
  lines w0.15: 23.815,5.625 23.815,13.42 ; 26.115,5.625 26.115,13.42 ; 27.365,13.42 26.115,13.42 20.54,13.42 20.54,5.625 29.165,5.625 29.165,13.42 28.515,13.42
  lines w0.2: 48.34,11.282 48.34,13.706 ; 48.348,12.494 70.878,12.494 ; 72.25,13.866 70.878,12.494 ; 74.815,13.86 73.475,12.494 70.878,12.494 ; 35.083,6.946 40.038,6.946 40.038,10.16 35.083,10.16 35.083,6.946
  text "GND" at 5.497,18.98 h0.9 r90
  text "VBUS" at 7.995,16.722 h0.75 r90
  text "(RA7)" at 75.03,16.338 h0.75 r45
  text "(RA6)" at 77.57,16.166 h0.75 r45
  text "RC1" at 23.735,16.074 h0.75
  text "RA5" at 28.94,16.074 h0.75
  text "RB4" at 34.02,16.074 h0.75
  text "RA1" at 38.975,16.074 h0.75
  text "GND" at 44.18,16.074 h0.75
  text "RD6" at 49.26,16.074 h0.75
  text "RA4" at 54.34,16.074 h0.75
  text "RF6" at 59.42,16.074 h0.75
  text "RF4" at 64.5,16.074 h0.75
  text "RE1" at 69.455,16.074 h0.75
  text "D3" at 13.325,15.972 h0.75
  text "GND" at 18.78,15.972 h0.75
  text "VOFF" at 11.535,15.693 h0.75
  text "D0" at 15.865,15.693 h0.75
  text "VTG" at 21.32,15.693 h0.75
  text "RC0" at 26.4,15.677 h0.75
  text "RB5" at 31.48,15.677 h0.75
  text "RA2" at 36.56,15.677 h0.75
  text "RA0" at 41.64,15.677 h0.75
  text "RD7" at 46.72,15.677 h0.75
  text "RD5" at 51.8,15.677 h0.75
  text "RF7" at 56.88,15.677 h0.75
  text "RF5" at 61.96,15.677 h0.75
  text "GND" at 67.04,15.677 h0.75
  text "RE0" at 72.12,15.677 h0.75
  text "CONNECTIONS" at 26.711,13.774 h0.7
  text "RA7" at 47.851,12.881 h0.75
  text "DEBUGGER" at 20.205,12.397 h0.75 r90
  text "D3" at 23.485,12.335 h0.75
  text "RE3" at 28.848,12.335 h0.75
  text "TARGET" at 30.265,11.647 h0.75 r90
  text "RA6" at 47.851,11.357 h0.75
  text "D2" at 23.485,11.06 h0.75
  text "RA3" at 28.848,11.06 h0.75
  text "4" at 41.725,10.45 h5
  text "C" at 18.974,10.414 h9.7
  text "D1" at 23.485,9.785 h0.75
  text "RB6" at 28.848,9.785 h0.75
  text "RC0" at 37.407,8.923 h0.75
  text "D0" at 23.485,8.51 h0.75
  text "RB7" at 28.848,8.51 h0.75
  text "CDC" at 21.719,7.985 h0.75 r90
  text "'.ProjectPCBFabNumber' Rev'.ProjectPCBFabRevision'" at 64.6,7.7 h2
  text "RC1" at 37.407,7.399 h0.75
  text "RX" at 23.485,7.235 h0.75
  text "RF0" at 28.848,7.235 h0.75
  text "GND" at 11.5,6.655 h0.75
  text "TX" at 23.485,5.96 h0.75
  text "RF1" at 28.848,5.96 h0.75
  text "" at 17.247,5.918 h5
  text "BOOT" at 11.5,5.41 h0.75
  text "1" at 48.697,5.175 h5
  text "Microchip © 2024" at 64.9,5.175 h2
  text "CDC" at 14.955,4.825 h0.75
  text "ID" at 10.722,3.913 h0.75
  text "TX" at 15.865,3.913 h0.75
  text "D2" at 20.945,3.913 h0.75
  text "RD1" at 26.275,3.913 h0.75
  text "RB1" at 31.355,3.913 h0.75
  text "RC5" at 36.56,3.913 h0.75
  text "RD4" at 41.64,3.913 h0.75
  text "RB0" at 46.72,3.913 h0.75
  text "RE2" at 51.8,3.913 h0.75
  text "RC2" at 56.88,3.913 h0.75
  text "RD2" at 61.96,3.913 h0.75
  text "GND" at 67.04,3.913 h0.75
  text "RF1" at 71.995,3.913 h0.75
  text "RF3" at 77.2,3.913 h0.75
  text "GND" at 5.497,3.74 h0.9 r90
  text "NC" at 8.245,3.534 h0.75
  text "RX" at 13.325,3.534 h0.75
  text "D1" at 18.28,3.534 h0.75
  text "RD0" at 23.86,3.534 h0.75
  text "RB2" at 28.94,3.534 h0.75
  text "RC4" at 34.02,3.534 h0.75
  text "RC6" at 39.1,3.534 h0.75
  text "GND" at 44.18,3.534 h0.75
  text "RB3" at 49.26,3.534 h0.75
  text "RC7" at 54.34,3.534 h0.75
  text "RC3" at 59.42,3.534 h0.75
  text "RD3" at 64.5,3.534 h0.75
  text "RF0" at 69.58,3.534 h0.75
  text "RF2" at 74.66,3.534 h0.75
  text ".ProjectPCBFabRevision" at 209.188,-104.562 h1.5
  text "'.Layer_Name'" at 174.01,-104.74 h1.5
Top Paste:
  text ".ProjectPCBFabRevision" at 209.188,-104.562 h1.5
  text "'.Layer_Name'" at 174.01,-104.74 h1.5
Bottom Paste:
  text ".ProjectPCBFabRevision" at 209.188,-104.562 h1.5
  text "'.Layer_Name'" at 174.01,-104.74 h1.5
Top Solder:
  text ".ProjectPCBFabRevision" at 209.188,-104.562 h1.5
  text "'.Layer_Name'" at 174.01,-104.74 h1.5
Bottom Solder:
  text ".ProjectPCBFabRevision" at 209.188,-104.562 h1.5
  text "'.Layer_Name'" at 174.01,-104.74 h1.5
NOTES (M1):
  lines w0.1: -2.5,-2.5 86.32,-2.5 86.32,22.82 -2.5,22.82 -2.5,-2.5
  text "'.Layer_Name'" at 192.01,-104.74 h1.5
BOARD (M2):
  the board outline again, w0.1
  text ".ProjectPCBFabRevision" at 209.188,-104.562 h1.5
  text "'.Layer_Name'" at 174.01,-104.74 h1.5
REF POINTS (M3):
  text "'.Layer_Name'" at 174.01,-104.74 h1.5
FAB (M4):
  text ".ProjectPCBFabRevision" at 209.188,-104.562 h1.5
  text "'.Layer_Name'" at 174.01,-104.74 h1.5
Case (M5):
  text "'.Layer_Name'" at 174.01,-104.74 h1.5
Cover (M6):
  text "'.Layer_Name'" at 174.01,-104.74 h1.5
Terminal Block (M7):
  text "'.Layer_Name'" at 174.01,-104.74 h1.5
Route Tool Path:
  text "'.Layer_Name'" at 174.01,-104.74 h1.5
V-Cut (M9):
  text "'.Layer_Name'" at 174.01,-104.74 h1.5
Bottom Assembly:
  text "'.VariantName'" at -76.44,-88.74 h0.9
  text "ASSEMBLY VARIANT:" at -62.19,-88.74 h0.9
  text "DOCUMENT NUMBER:" at -108.44,-96.99 h1.15
  text "'.ProjectPCBAssyNumber'_ASSY-D" at -108.69,-99.99 h1.38
  text ".ProjectPCBAssyRevision" at -125.368,-104.562 h1.5
  text "'.Layer_Name'" at -90.49,-104.74 h1
Top Assembly:
  text "ASSEMBLY VARIANT:" at 146.01,-88.74 h0.9
  text "'.VariantName'" at 160.26,-88.74 h0.9
  text "DOCUMENT NUMBER:" at 192.26,-96.99 h1.15
  text "'.ProjectPCBAssyNumber'_ASSY-D" at 192.51,-99.99 h1.38
  text ".ProjectPCBAssyRevision" at 209.188,-104.562 h1.5
  text "'.Layer_Name'" at 174.01,-104.74 h1
Bottom 3D Body:
  text "'.Layer_Name'" at 174.01,-104.74 h1.15
Top 3D Body:
  text "'.Layer_Name'" at 174.01,-104.74 h1.2
Bottom Courtyard:
  text ".ProjectPCBFabRevision" at 209.188,-104.562 h1.5
  text "'.Layer_Name'" at 174.01,-104.74 h1
Top Courtyard:
  text ".ProjectPCBFabRevision" at 209.188,-104.562 h1.5
  text "'.Layer_Name'" at 174.01,-104.74 h1.1
TITLE (M16):
  lines w0.1: 145.51,-87.49 227.33,-87.49 ; 197.51,-79.99 197.51,-82.99 227.33,-82.99 ; 216.05,-104.625 216.05,-103.355 ; 216.05,-103.99 226.21,-103.99 ; 216.21,-102.79 216.21,-101.79 ; 216.21,-102.29 226.21,-102.29 ; 218.59,-104.625 218.59,-103.355 ; 221.13,-104.625 221.13,-103.355 ; 221.21,-102.59 221.21,-101.99 ; 223.67,-104.625 223.67,-103.355 ; 226.21,-104.625 226.21,-103.355 ; 226.21,-102.79 226.21,-101.79 ; 227.33,-82.99 227.33,-82.99
  lines w0.127: -148.59,-50.165 -143.51,-50.165 ; -148.59,10.16 -143.51,10.16 ; -148.59,70.485 -143.51,70.485 ; -85.09,-110.49 -85.09,-105.41 ; -85.09,125.73 -85.09,130.81 ; -21.59,-110.49 -21.59,-105.41 ; -21.59,125.73 -21.59,130.81 ; 41.91,-110.49 41.91,-105.41 ; 41.91,125.73 41.91,130.81 ; 77.47,-105.41 113.03,-105.41 ; 105.41,-110.49 105.41,-105.41 ; 105.41,125.73 105.41,130.81 ; 145.51,-105.41 145.51,-79.99 ; 145.51,-100.99 227.33,-100.99 ; 145.51,-94.99 227.33,-94.99 ; 145.51,-88.99 227.33,-88.99 ; 168.91,-110.49 168.91,-105.41 ; 168.91,125.73 168.91,130.81 ; 173.51,-105.41 173.51,-88.99 ; 191.51,-100.99 191.51,-94.99 ; 204.51,-105.41 204.51,-100.99 ; 212.01,-105.41 212.01,-94.99 ; 227.33,-74.93 227.33,-105.41 ; 227.33,-50.165 232.41,-50.165 ; 227.33,10.16 232.41,10.16 ; 227.33,70.485 232.41,70.485 ; 227.33,-105.41 227.33,-79.99 111.51,-79.99 111.51,-105.41 227.33,-105.41 ; 227.33,-105.41 -143.51,-105.41 -143.51,125.73 227.33,125.73 227.33,-105.41 ; -148.59,-110.49 232.41,-110.49 232.41,130.81 -148.59,130.81 -148.59,-110.49
  lines w0.254: 116.83,116.73 116.83,121.23 116.83,125.73 ; 129.33,116.73 129.33,121.23 129.33,125.73 ; 207.83,116.73 207.83,121.23 207.83,125.73 ; 227.33,121.23 105.83,121.23 ; 105.83,121.23 105.83,125.73 227.33,125.73 227.33,116.73 105.83,116.73 105.83,121.23
  text "1" at -117.314,127.508 h1.78
  text "2" at -53.924,127.508 h1.78
  text "3" at 9.305,127.508 h1.78
  text "4" at 72.974,127.508 h1.78
  text "5" at 136.449,127.508 h1.78
  text "6" at 200.076,127.508 h1.78
  text "REV" at 108.33,122.73 h1.52
  text "ECO" at 118.33,122.73 h1.52
  text "Comments" at 164.83,122.23 h1.52
  text "Date" at 212.83,122.23 h1.52
  text "A" at -146.685,98.476 h1.78
  text "A" at 229.235,98.476 h1.78
  text "B" at -146.685,38.024 h1.78
  text "B" at 229.235,38.024 h1.78
  text "C" at -146.685,-22.301 h1.78
  text "C" at 229.235,-22.301 h1.78
  text "PART NUMBER:" at 198.51,-81.99 h1
  text "'.ProjectpartNumber'" at 210.51,-82.24 h1.5
  text "D" at -146.685,-82.499 h1.78
  text "TITLE:" at 146.51,-82.49 h1.14
  text "D" at 229.235,-82.499 h1.78
  text "'.ProjectTitle'" at 146.51,-86.49 h2.5
  text "PCB Layout Contact:" at 146.51,-90.99 h1.15
  text "GERBER FILE:" at 174.51,-90.99 h1.15
  text ".ProjectContactPCB" at 146.51,-93.99 h1.6
  text "'.Plot_File_Name'" at 174.51,-93.99 h1.5
  text "M" at 114.51,-95.99 h15.24
  text "Project Owner:" at 146.51,-96.99 h1.15
  text "PCB NUMBER:" at 174.51,-96.99 h1.15
  text "DATE:" at 213.21,-96.99 h1.14
  text "Microchip Technology Inc." at 113.28,-99.25 h1.78
  text ".ProjectContactOwner" at 146.51,-99.99 h1.6
  text ".ProjectPCBFabNumber" at 174.51,-99.99 h1.6
  text "'.PRINT_DATE'" at 213.21,-99.99 h1.5
  text "2355 W. Chandler Blvd." at 114.51,-101.99 h1.78
  text "LAYER NAME:" at 174.51,-102.49 h1.14
  text "10mm" at 212.51,-102.59 h0.7
  text "PCB FILE NAME:" at 146.51,-102.74 h1.15
  text "REV:" at 205.26,-102.74 h1.14
  text "400mil" at 212.41,-104.29 h0.7
  text "Chandler, AZ  85224" at 115.51,-104.49 h1.78
  text "'.PCB_FILE_NAME_NO_PATH'" at 146.51,-104.74 h1
  text "1" at -117.314,-108.712 h1.78
  text "2" at -53.924,-108.712 h1.78
  text "3" at 9.305,-108.712 h1.78
  text "4" at 72.974,-108.712 h1.78
  text "5" at 136.449,-108.712 h1.78
  text "6" at 200.076,-108.712 h1.78
Drill Drawing:
  text "DOCUMENT NUMBER:" at 192.26,-96.99 h1.15
  text "'.ProjectPCBFabNumber'_FAB-D" at 192.51,-99.99 h1.38
  text ".ProjectPCBFabRevision" at 209.188,-104.562 h1.5
TITLE MIRROR (M17):
  lines w0.1: -143.51,-87.49 -61.69,-87.49 ; -142.39,-104.625 -142.39,-103.355 ; -142.39,-103.99 -132.23,-103.99 ; -142.39,-102.79 -142.39,-101.79 ; -142.39,-102.29 -132.39,-102.29 ; -139.85,-104.625 -139.85,-103.355 ; -137.39,-102.59 -137.39,-101.99 ; -137.31,-104.625 -137.31,-103.355 ; -134.77,-104.625 -134.77,-103.355 ; -132.39,-102.79 -132.39,-101.79 ; -132.23,-104.625 -132.23,-103.355 ; -113.69,-79.99 -113.69,-82.99 -143.51,-82.99 ; -143.51,-82.99 -143.51,-82.99
  lines w0.127: -148.59,-50.165 -143.51,-50.165 ; -148.59,10.16 -143.51,10.16 ; -148.59,70.485 -143.51,70.485 ; -143.51,-100.99 -61.69,-100.99 ; -143.51,-94.99 -61.69,-94.99 ; -143.51,-88.99 -61.69,-88.99 ; -128.19,-105.41 -128.19,-94.99 ; -120.69,-105.41 -120.69,-100.99 ; -107.69,-100.99 -107.69,-94.99 ; -89.69,-105.41 -89.69,-88.99 ; -85.09,-110.49 -85.09,-105.41 ; -85.09,125.73 -85.09,130.81 ; -61.69,-105.41 -61.69,-79.99 ; -21.59,-110.49 -21.59,-105.41 ; -21.59,125.73 -21.59,130.81 ; 41.91,-110.49 41.91,-105.41 ; 41.91,125.73 41.91,130.81 ; 105.41,-110.49 105.41,-105.41 ; 105.41,125.73 105.41,130.81 ; 168.91,-110.49 168.91,-105.41 ; 168.91,125.73 168.91,130.81 ; 227.33,-50.165 232.41,-50.165 ; 227.33,10.16 232.41,10.16 ; 227.33,70.485 232.41,70.485 ; -143.51,-105.41 227.33,-105.41 227.33,125.73 -143.51,125.73 -143.51,-105.41 ; -143.51,-105.41 -27.69,-105.41 -27.69,-79.99 -143.51,-79.99 -143.51,-105.41 ; -148.59,-110.49 232.41,-110.49 232.41,130.81 -148.59,130.81 -148.59,-110.49
  lines w0.254: -143.51,121.23 -22.01,121.23 ; -124.01,116.73 -124.01,121.23 -124.01,125.73 ; -45.51,116.73 -45.51,121.23 -45.51,125.73 ; -33.01,116.73 -33.01,121.23 -33.01,125.73 ; -22.01,121.23 -22.01,125.73 -143.51,125.73 -143.51,116.73 -22.01,116.73 -22.01,121.23
  text "6" at -116.256,127.508 h1.78
  text "5" at -52.629,127.508 h1.78
  text "4" at 10.846,127.508 h1.78
  text "3" at 74.515,127.508 h1.78
  text "2" at 137.744,127.508 h1.78
  text "1" at 201.134,127.508 h1.78
  text "ECO" at -34.51,122.73 h1.52
  text "REV" at -24.51,122.73 h1.52
  text "Date" at -129.01,122.23 h1.52
  text "Comments" at -81.01,122.23 h1.52
  text "A" at -145.415,98.476 h1.78
  text "A" at 230.505,98.476 h1.78
  text "B" at -145.415,38.024 h1.78
  text "B" at 230.505,38.024 h1.78
  text "C" at -145.415,-22.301 h1.78
  text "C" at 230.505,-22.301 h1.78
  text "PART NUMBER:" at -114.69,-81.99 h1
  text "'.ProjectpartNumber'" at -126.69,-82.24 h1.5
  text "D" at -145.415,-82.499 h1.78
  text "TITLE:" at -62.69,-82.49 h1.14
  text "D" at 230.505,-82.499 h1.78
  text "'.ProjectTitle'" at -62.69,-86.49 h2.5
  text "GERBER FILE:" at -90.69,-90.99 h1.15
  text "PCB Layout Contact:" at -62.69,-90.99 h1.15
  text "'.Plot_File_Name'" at -90.69,-93.99 h1.5
  text ".ProjectContactPCB" at -62.69,-93.99 h1.6
  text "M" at -30.69,-95.99 h15.24
  text "DATE:" at -129.39,-96.99 h1.14
  text "PCB NUMBER:" at -90.69,-96.99 h1.15
  text "Project Owner:" at -62.69,-96.99 h1.15
  text "Microchip Technology Inc." at -29.46,-99.25 h1.78
  text "'.PRINT_DATE'" at -129.39,-99.99 h1.5
  text ".ProjectPCBFabNumber" at -90.69,-99.99 h1.6
  text ".ProjectContactOwner" at -62.69,-99.99 h1.6
  text "2355 W. Chandler Blvd." at -30.69,-101.99 h1.78
  text "LAYER NAME:" at -90.69,-102.49 h1.14
  text "10mm" at -128.69,-102.59 h0.7
  text "REV:" at -121.44,-102.74 h1.14
  text "PCB FILE NAME:" at -62.69,-102.74 h1.15
  text "400mil" at -128.59,-104.29 h0.7
  text "Chandler, AZ  85224" at -31.69,-104.49 h1.78
  text "'.PCB_FILE_NAME_NO_PATH'" at -62.69,-104.74 h1
  text "6" at -116.256,-108.712 h1.78
  text "5" at -52.629,-108.712 h1.78
  text "4" at 10.846,-108.712 h1.78
  text "3" at 74.515,-108.712 h1.78
  text "2" at 137.744,-108.712 h1.78
  text "1" at 201.134,-108.712 h1.78

## Dimensions
2.54,0 to 2.54,2.54 on Drill Drawing
0,2.54 to 2.54,2.54 on Drill Drawing

## Text inside footprints (layer, text, board x,y; h text height)
J100: Top Assembly "1" at 5.958,1.475 h0.4
U100: Top Assembly "1" at 51.2,5.825 h0.4 r45
U200: Top Assembly "1" at 16.25,14.525 h0.4
U204: Top Assembly "1" at 20.704,12.025 h0.4
U205: Top Assembly "1" at 20.704,10.525 h0.4
U207: Top Assembly "1" at 20.704,9.025 h0.4
U208: Top Assembly "1" at 20.704,6.525 h0.4
U209: Top Assembly "1" at 20.704,5.025 h0.4